# Altium PCB Temp_sense_Project 2.0(right angle.PcbDoc (part 4 of 5)
Units mm, origin at the board's own origin, x right, y up, seen from the top; angles counter-clockwise.
Board outline 238.12 x 109.47 mm, 4 copper layers (Top Layer, Layer 1, Layer 2, Bottom Layer), stack 0.603 mm thick; 185 components, 161 nets, 944 pads, 283 vias.
Unrouted connection lines stored in the file: 2.
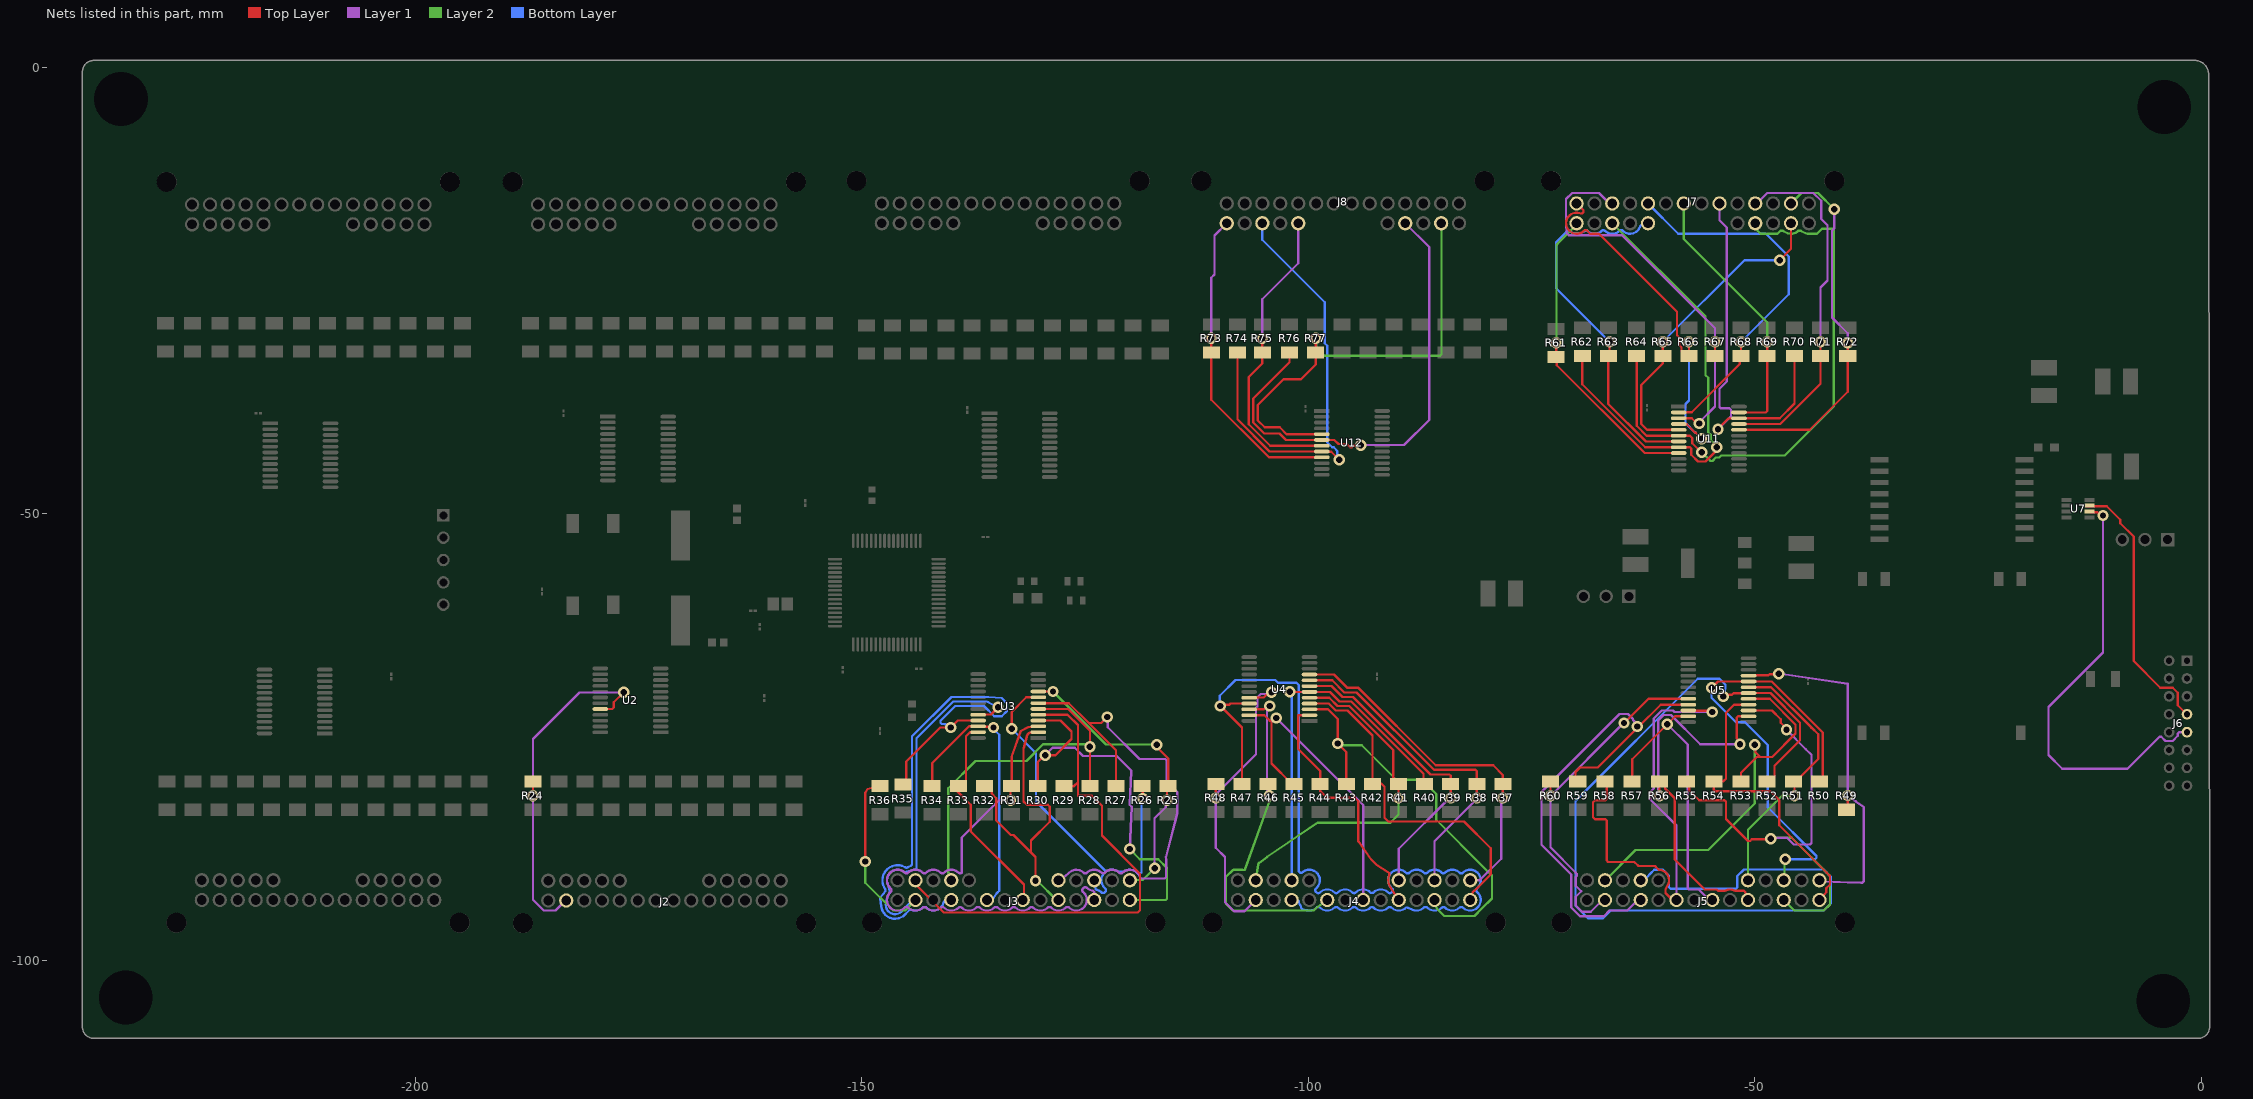
[diagram p5: the nets of this part, all layers, seen from the top]

## Via types
v1: diameter 1.27, hole 0.711, Top Layer to Bottom Layer, 278 vias
v2: diameter 0.711, hole 0.711, Top Layer to Bottom Layer, 4 vias
v3: diameter 1, hole 0.711, Top Layer to Bottom Layer, 1 vias

## Nets (pads, with @x,y where several pads share a name; then routed paths per layer and width w, separated by ;. In a path a pad name is that pad's centre, name@x,y a point inside that pad or via, vN(x,y) a via of type N, cw(c..) or ccw(c..) an arc to the next point about the centre after c; other vN are vias at no path point) (continued)
NetJ2_23: J2.23 R24.2 U2.20 | length 47.1
  Top Layer w0.254: v1(-186.808,-81.552) R24.2@-186.808,-79.968 ; U2.20@-179.261,-71.85 -177.934,-71.85 -177.746,-71.662 -177.746,-71.084 v1(-176.648,-69.986)
  Layer 1 w0.254: J2.23@-183.074,-93.278 J2.23@-183.1,-93.227 ; v1(-176.648,-69.986) -181.601,-69.986 -186.808,-75.193 v1(-186.808,-81.552) -186.808,-93.196 -185.595,-94.408 -184.281,-94.408 ; -184.281,-94.408 J2.23@-183.1,-93.227 ; -184.281,-94.408 J2.23@-183.1,-93.227 ; -184.281,-94.408 J2.23@-183.1,-93.227 ; -184.281,-94.408 J2.23@-183.112,-93.24 ; -184.281,-94.408 J2.23@-183.112,-93.24 ; J2.23@-183.112,-93.24 J2.23@-183.1,-93.227 ; J2.23@-183.112,-93.24 J2.23@-183.1,-93.227
NetJ3_1: J3.1 R25.2 U3.9 | length 36.7
  Top Layer w0.254: U3.9@-130.22,-69.885 v1(-128.591,-69.885) ; v1(-116.958,-75.828) -116.958,-76.103 -115.688,-77.373 R25.2@-115.688,-80.476 R25.2@-115.409,-80.476 ; v1(-115.815,-82.06) R25.2@-115.815,-80.882 ; R25.2@-115.815,-80.882 R25.2@-115.548,-80.615 ; R25.2@-115.815,-80.882 R25.2@-115.409,-80.476 ; R25.2@-115.815,-80.882 R25.2@-115.409,-80.476 ; R25.2@-115.815,-80.882 R25.2@-115.409,-80.476 ; R25.2@-115.815,-80.882 R25.2@-115.548,-80.615 ; R25.2@-115.548,-80.615 R25.2@-115.409,-80.476 ; R25.2@-115.548,-80.615 R25.2@-115.409,-80.476
  Layer 1 w0.254: v1(-117.212,-89.671) -117.212,-84.073 -115.972,-82.832 -115.972,-82.216 v1(-115.815,-82.06)
  Layer 2 w0.254: v1(-128.591,-69.885) -122.648,-75.828 v1(-116.958,-75.828) ; J3.1@-119.981,-91.017 -119.947,-90.984 -118.525,-90.984 v1(-117.212,-89.671)
NetJ3_3: J3.3 R26.2 U3.8 | length 72.8
  Top Layer w0.254: v1(-133.214,-74.05) -133.214,-72.165 -131.584,-70.535 U3.8@-130.22,-70.535 ; R26.2@-118.609,-80.476 -118.551,-80.533 v1(-118.551,-81.866)
  Bottom Layer w0.254: v1(-133.214,-74.05) -130.482,-76.782 -130.482,-82.211 ; J3.3@-123.968,-91.017 J3.3@-123.835,-91.151 ; v1(-118.551,-81.866) -118.685,-82 -118.685,-90.134 ; -130.482,-82.211 -122.652,-90.041 ; -130.482,-82.211 -122.652,-90.041 ; -123.835,-92.054 cw(c-123.968,-93.227) -123.152,-92.373 ; -123.835,-92.054 cw(c-123.968,-93.227) -123.152,-92.373 ; -123.835,-92.054 cw(c-123.968,-93.227) -123.152,-92.373 ; -123.835,-92.054 J3.3@-123.835,-91.151 ; -123.835,-92.054 J3.3@-123.835,-91.151 ; -123.835,-92.054 J3.3@-123.835,-91.151 ; -123.152,-92.373 ccw(c-122.978,-92.189) -122.803,-92.373 ; -123.152,-92.373 ccw(c-122.978,-92.189) -122.803,-92.373 ; -123.152,-92.373 ccw(c-122.978,-92.189) -122.803,-92.373 ; -122.803,-92.373 cw(c-121.987,-93.227) -122.74,-92.317 ccw(c-122.903,-92.122) -122.74,-91.927 ; -122.74,-91.927 cw(c-121.987,-91.017) -122.654,-90.042 ; -122.74,-91.927 cw(c-121.987,-91.017) -122.654,-90.042 ; -122.74,-91.927 cw(c-121.987,-91.017) -122.654,-90.042 ; -122.654,-90.042 -122.652,-90.041 ; -122.654,-90.042 -122.652,-90.041 ; -122.654,-90.042 -122.652,-90.041 ; -122.652,-90.041 cw(c-121.987,-91.017) -121.323,-90.041 ; -122.652,-90.041 cw(c-121.987,-91.017) -121.323,-90.041 ; -122.652,-90.041 cw(c-121.987,-91.017) -121.323,-90.041 ; -121.323,-90.041 -120.645,-90.041 ; -121.323,-90.041 -120.645,-90.041 ; -121.323,-90.041 -120.645,-90.041 ; -120.645,-90.041 cw(c-119.981,-91.017) -119.123,-90.206 ; -120.645,-90.041 cw(c-119.981,-91.017) -119.123,-90.206 ; -120.645,-90.041 cw(c-119.981,-91.017) -119.123,-90.206 ; -119.123,-90.206 ccw(c-118.939,-90.03) -119.118,-90.21 -119.044,-90.283 ; -119.044,-90.283 -118.941,-90.284 ; -119.044,-90.283 -118.941,-90.284 ; -119.044,-90.283 -118.941,-90.284 ; -118.941,-90.284 ccw(c-118.939,-90.03) -118.937,-90.284 ; -118.941,-90.284 ccw(c-118.939,-90.03) -118.937,-90.284 ; -118.941,-90.284 ccw(c-118.939,-90.03) -118.937,-90.284 ; -118.937,-90.284 -118.834,-90.283 ; -118.937,-90.284 -118.834,-90.283 ; -118.937,-90.284 -118.834,-90.283 ; -118.834,-90.283 -118.76,-90.21 ; -118.834,-90.283 -118.76,-90.21 ; -118.834,-90.283 -118.76,-90.21 ; -118.76,-90.21 ccw(c-118.939,-90.03) -118.759,-90.209 ; -118.76,-90.21 ccw(c-118.939,-90.03) -118.759,-90.209 ; -118.76,-90.21 ccw(c-118.939,-90.03) -118.759,-90.209 ; -118.759,-90.209 -118.685,-90.134 ; -118.759,-90.209 -118.685,-90.134 ; -118.759,-90.209 -118.685,-90.134
NetJ3_5: J3.5 R27.2 U3.7 | length 63.8
  Top Layer w0.254: U3.7@-130.22,-71.185 -126.815,-71.185 -124.585,-73.415 ; v1(-122.507,-72.741) -123.181,-73.415 -124.585,-73.415 ; R27.2@-121.53,-80.476 -121.53,-76.47 -124.585,-73.415
  Layer 1 w0.254: J3.5@-127.982,-91.017 -127.09,-90.465 ; v1(-122.507,-72.741) -122.458,-73.884 -118.914,-77.428 -116.04,-77.428 -115.966,-77.503 -115.891,-77.577 -115.891,-80.835 -115.742,-80.984 -114.821,-80.984 -114.672,-81.132 -114.672,-83.461 -114.68,-83.525 -115.949,-88.417 -115.947,-88.515 -115.9,-88.684 -115.9,-88.824 -115.926,-90.669 -115.997,-90.74 -116.071,-90.814 -118.725,-90.814 -118.8,-90.74 ; -127.09,-90.465 -126.884,-90.264 ; -127.09,-90.465 -126.884,-90.264 ; -127.09,-90.465 -126.884,-90.264 ; -126.884,-90.264 cw(c-125.975,-91.017) -125.148,-90.174 ; -126.884,-90.264 cw(c-125.975,-91.017) -125.148,-90.174 ; -126.884,-90.264 cw(c-125.975,-91.017) -125.148,-90.174 ; -125.148,-90.174 ccw(c-124.972,-89.991) -124.795,-90.174 cw(c-123.968,-91.017) -123.152,-90.164 ccw(c-122.978,-89.979) -122.803,-90.164 cw(c-121.987,-91.017) -121.161,-90.174 ccw(c-120.984,-89.991) -120.807,-90.174 ; -120.807,-90.174 cw(c-119.981,-91.017) -118.844,-90.695 ; -120.807,-90.174 cw(c-119.981,-91.017) -118.844,-90.695 ; -120.807,-90.174 cw(c-119.981,-91.017) -118.844,-90.695 ; -118.844,-90.695 -118.8,-90.74 ; -118.844,-90.695 -118.8,-90.74 ; -118.844,-90.695 -118.8,-90.74
NetJ3_7: J3.7 R28.2 U3.6 | length 41.4
  Top Layer w0.254: U3.6@-130.22,-71.835 -126.884,-71.835 -124.451,-74.268 v1(-124.451,-76.082) R28.2@-124.451,-80.476
  Layer 2 w0.254: J3.7@-139.97,-91.017 -140.228,-90.76 -140.228,-90.27 -140.302,-90.195 -140.302,-80.703 -137.262,-77.663 -131.556,-77.663 -129.692,-75.798 -124.735,-75.798 v1(-124.451,-76.082)
NetJ3_9: J3.9 R29.2 U3.5 | length 58.2
  Top Layer w0.254: J3.9@-143.984,-91.017 -143.857,-91.144 -143.857,-91.576 -140.801,-94.631 -119.099,-94.631 -118.838,-94.37 -118.838,-90.281 -123.105,-86.013 -123.105,-82.686 -124.248,-81.543 -125.797,-81.543 -125.797,-80.044 ; U3.5@-130.22,-72.485 -126.952,-72.485 -125.797,-73.64 -125.797,-80.044 ; R29.2@-127.372,-80.476 -126.228,-80.476 -125.797,-80.044
NetJ3_11: J3.11 R30.2 U3.4 | length 45
  Top Layer w0.254: R30.2@-130.293,-80.476 -130.293,-77.779 v1@-129.674,-77.161 ; U3.4@-130.22,-73.135 -127.739,-73.135 -126.513,-74.362 -126.513,-75.203 -128.318,-77.009 v1(-129.466,-77.009)
  Layer 1 w0.254: v1(-129.466,-77.009) -128.638,-76.181 -126.144,-76.181 -125.227,-77.098 -121.454,-77.098 -119.811,-78.74 -120.006,-82.559 -119.766,-82.799 v1(-120.006,-87.512)
  Layer 2 w0.254: v1(-120.006,-87.512) -118.863,-88.655 -116.791,-88.655 -115.815,-89.631 -115.815,-93.078 -115.964,-93.227 J3.11@-119.981,-93.227
NetJ3_13: J3.13 R31.2 U3.3 | length 72.7
  Top Layer w0.254: U3.3@-130.22,-73.785 -131.379,-73.888 -132.198,-74.304 -133.214,-77.21 -133.214,-78.645 ; v1(-133.341,-82.06) R31.2@-133.341,-80.782 ; v1(-133.341,-82.06) R31.2@-133.341,-80.782 ; v1(-133.341,-82.06) R31.2@-133.341,-80.782 ; R31.2@-133.341,-80.782 cw(c-132.907,-80.782) R31.2@-133.214,-80.476 ; R31.2@-133.341,-80.782 cw(c-132.907,-80.782) R31.2@-133.214,-80.476 ; R31.2@-133.341,-80.782 cw(c-132.907,-80.782) R31.2@-133.214,-80.476 ; R31.2@-133.214,-80.476 -133.214,-78.645 ; R31.2@-133.214,-80.476 -133.214,-78.645 ; R31.2@-133.214,-80.476 -133.214,-78.645
  Layer 1 w0.254: v1(-133.341,-82.06) -134.62,-82.06 -138.795,-86.235 -138.795,-90.015 -138.805,-90.025 ; J3.13@-123.968,-93.227 -123.968,-92.324 -124.043,-92.25 -124.102,-92.191 ; -139.154,-90.164 ccw(c-139.97,-91.017) -140.797,-90.174 cw(c-140.974,-89.991) -141.15,-90.174 ccw(c-141.977,-91.017) -142.804,-90.174 cw(c-142.98,-89.991) -143.157,-90.174 ccw(c-143.984,-91.017) -144.81,-90.174 cw(c-144.987,-89.991) -145.164,-90.174 ccw(c-145.99,-91.017) -146.743,-91.927 cw(c-146.906,-92.122) -146.743,-92.317 ccw(c-145.99,-93.227) -145.164,-94.071 cw(c-144.987,-94.253) -144.81,-94.071 ccw(c-143.984,-93.227) -143.157,-94.071 cw(c-142.98,-94.253) -142.803,-94.071 ccw(c-141.977,-93.227) -141.151,-94.071 cw(c-140.974,-94.253) -140.797,-94.071 ccw(c-139.97,-93.227) -139.154,-94.081 cw(c-138.98,-94.265) -138.805,-94.081 ccw(c-137.989,-93.227) -137.163,-94.071 cw(c-136.986,-94.253) -136.809,-94.071 ccw(c-135.983,-93.227) -135.156,-94.071 cw(c-134.979,-94.253) -134.802,-94.071 ccw(c-133.976,-93.227) -133.15,-94.071 cw(c-132.973,-94.253) -132.796,-94.071 ccw(c-131.969,-93.227) -131.153,-94.081 cw(c-130.979,-94.265) -130.804,-94.081 ccw(c-129.988,-93.227) -129.162,-94.071 cw(c-128.985,-94.253) -128.808,-94.071 ccw(c-127.982,-93.227) -127.155,-94.071 cw(c-126.978,-94.253) -126.801,-94.071 ccw(c-125.975,-93.227) -125.222,-92.317 cw(c-125.059,-92.122) -125.222,-91.927 ccw(c-125.975,-91.017) -125.149,-91.861 cw(c-124.972,-92.043) -124.795,-91.861 ; -139.154,-90.164 ccw(c-138.98,-89.979) -138.805,-90.164 ; -139.154,-90.164 ccw(c-138.98,-89.979) -138.805,-90.164 ; -139.154,-90.164 ccw(c-138.98,-89.979) -138.805,-90.164 ; -138.805,-90.164 -138.805,-90.025 ; -138.805,-90.164 -138.805,-90.025 ; -138.805,-90.164 -138.805,-90.025 ; -124.795,-91.861 ccw(c-123.968,-91.017) -124.102,-92.191 ; -124.795,-91.861 ccw(c-123.968,-91.017) -124.102,-92.191 ; -124.795,-91.861 ccw(c-123.968,-91.017) -124.102,-92.191
NetJ3_15: J3.15 R32.2 U3.2 | length 51.1
  Top Layer w0.254: R32.2@-136.262,-80.476 -135.986,-80.476 -135.436,-81.026 -135.436,-81.313 -134.928,-81.821 -134.928,-84.313 -133.304,-85.937 -133.011,-85.937 -131.055,-87.893 ; v1(-130.547,-91.068) -130.547,-88.401 -131.055,-87.893 ; U3.2@-130.22,-74.435 U3.2@-130.889,-74.435 ; -131.88,-82.185 -131.88,-76.269 ; -131.88,-82.185 -131.497,-82.568 -129.182,-82.568 -128.959,-82.791 -128.959,-84.462 -131.055,-86.558 -131.055,-87.893 ; -131.88,-82.185 -131.88,-76.269 ; -131.88,-82.185 -131.88,-76.269 ; -131.88,-76.269 cw(c-131.626,-76.269) -131.87,-76.199 ; -131.88,-76.269 cw(c-131.626,-76.269) -131.87,-76.199 ; -131.88,-76.269 cw(c-131.626,-76.269) -131.87,-76.199 ; -131.87,-76.199 -131.463,-74.773 ; -131.87,-76.199 -131.463,-74.773 ; -131.87,-76.199 -131.463,-74.773 ; -131.463,-74.773 cw(c-131.096,-74.878) -131.186,-74.507 ; -131.463,-74.773 cw(c-131.096,-74.878) -131.186,-74.507 ; -131.463,-74.773 cw(c-131.096,-74.878) -131.186,-74.507 ; -131.186,-74.507 U3.2@-130.889,-74.435 ; -131.186,-74.507 U3.2@-130.889,-74.435 ; -131.186,-74.507 U3.2@-130.889,-74.435
  Layer 2 w0.254: v1(-130.547,-91.068) -130.344,-91.068 -128.185,-93.227 J3.15@-127.982,-93.227
NetJ3_17: J3.17 R33.2 U3.23 | length 54.4
  Top Layer w0.254: U3.23@-136.97,-74.435 -137.866,-74.435 -138.319,-74.888 ; J3.17@-131.969,-93.227 J3.17@-131.842,-93.354 ; J3.17@-131.842,-93.786 J3.17@-131.842,-93.227 ; R33.2@-138.319,-80.476 -138.319,-74.888 ; R33.2@-138.319,-80.476 R33.2@-139.183,-80.476 -139.319,-81.026 -137.786,-82.559 -137.786,-85.556 -131.842,-91.5 ; R33.2@-138.319,-80.476 -138.319,-74.888 ; R33.2@-138.319,-80.476 -138.319,-74.888 ; R33.2@-138.319,-80.476 -138.319,-74.888 ; R33.2@-138.319,-80.476 -138.319,-74.888 ; J3.17@-131.842,-93.354 J3.17@-131.842,-93.227 ; J3.17@-131.842,-93.354 -131.842,-91.5 ; J3.17@-131.842,-93.354 -131.842,-91.5 ; J3.17@-131.842,-93.354 J3.17@-131.842,-93.227 ; J3.17@-131.842,-93.227 -131.842,-91.5 ; J3.17@-131.842,-93.227 -131.842,-91.5 ; J3.17@-131.842,-93.227 -131.842,-91.5
NetJ3_19: J3.19 R34.2 U3.22 | length 34.3
  Top Layer w0.254: R34.2@-142.104,-80.476 -142.104,-77.9 -137.989,-73.785 U3.22@-136.97,-73.785 -136.939,-73.816 -135.342,-73.816 v1(-135.246,-73.912)
  Bottom Layer w0.254: J3.19@-135.983,-93.227 -135.469,-93.227 -135.32,-93.078 -134.938,-92.542 ; v1(-135.246,-73.912) -135.246,-74.079 -134.611,-74.714 -134.611,-92.192 ; -134.938,-92.542 cw(c-133.976,-93.227) -134.811,-92.392 ; -134.938,-92.542 cw(c-133.976,-93.227) -134.811,-92.392 ; -134.938,-92.542 cw(c-133.976,-93.227) -134.811,-92.392 ; -134.938,-92.542 cw(c-133.976,-93.227) -134.811,-92.392 ; -134.938,-92.542 cw(c-133.976,-93.227) -134.811,-92.392 ; -134.938,-92.542 cw(c-133.976,-93.227) -134.811,-92.392 ; -134.938,-92.542 cw(c-133.976,-93.227) -134.811,-92.392 ; -134.938,-92.542 cw(c-133.976,-93.227) -134.811,-92.392 ; -134.938,-92.542 cw(c-133.976,-93.227) -134.811,-92.392 ; -134.811,-92.392 -134.611,-92.192 ; -134.811,-92.392 -134.611,-92.192 ; -134.811,-92.392 -134.611,-92.192 ; -134.811,-92.392 -134.611,-92.192 ; -134.811,-92.392 -134.611,-92.192
NetJ3_21: J3.21 R35.2 U3.21 | length 87.8
  Top Layer w0.254: R35.2@-145.393,-80.297 R35.2@-145.025,-80.297 ; U3.21@-136.97,-73.135 -139.244,-73.135 v1(-140.021,-73.912) -141.204,-73.912 -145.025,-77.733 ; R35.2@-145.025,-80.297 -145.025,-77.733 ; R35.2@-145.025,-80.297 -145.025,-77.733 ; R35.2@-145.025,-80.297 -145.025,-77.733
  Bottom Layer w0.254: -144.511,-89.412 ccw(c-143.984,-91.017) -144.857,-89.571 cw(c-144.987,-89.353) -145.117,-89.571 ccw(c-145.99,-91.017) -147.379,-91.978 cw(c-147.589,-92.122) -147.379,-92.266 ccw(c-145.99,-93.227) -147.504,-92.478 -147.922,-92.923 -147.922,-93.045 -147.8,-93.975 ; J3.21@-139.97,-93.227 J3.21@-140.7,-93.323 ; -147.8,-93.975 ccw(c-146.268,-93.775) -145.655,-95.193 ; -147.8,-93.975 ccw(c-146.268,-93.775) -145.655,-95.193 ; -147.8,-93.975 ccw(c-146.268,-93.775) -145.655,-95.193 ; -145.655,-95.193 -145.391,-95.079 ; -145.655,-95.193 -145.391,-95.079 ; -145.655,-95.193 -145.391,-95.079 ; -145.391,-95.079 -144.618,-94.307 -144.462,-94.307 ccw(c-143.984,-93.227) -143.157,-94.071 cw(c-142.98,-94.253) -142.803,-94.071 ; -144.511,-89.412 -144.469,-89.371 ; -144.511,-89.412 -144.469,-89.371 ; -144.511,-89.412 -144.469,-89.371 ; -144.469,-89.371 ccw(c-144.649,-89.192) -144.468,-89.37 ; -144.469,-89.371 ccw(c-144.649,-89.192) -144.468,-89.37 ; -144.469,-89.371 ccw(c-144.649,-89.192) -144.468,-89.37 ; -144.468,-89.37 -144.365,-89.264 -144.365,-74.906 -139.952,-70.494 -135.802,-70.494 -134.317,-70.621 -133.722,-71.216 -133.722,-72.058 -134.317,-72.653 -135.159,-72.653 -136.302,-71.51 -139.531,-71.51 -141.185,-73.163 -141.185,-73.268 -141.185,-73.374 -141.11,-73.448 -141.036,-73.522 ; -142.803,-94.071 ccw(c-141.977,-93.227) -140.815,-93.437 ; -142.803,-94.071 ccw(c-141.977,-93.227) -140.815,-93.437 ; -142.803,-94.071 ccw(c-141.977,-93.227) -140.815,-93.437 ; -141.036,-73.522 -140.996,-73.522 ; -141.036,-73.522 -140.996,-73.522 ; -141.036,-73.522 -140.996,-73.522 ; -140.996,-73.522 cw(c-140.977,-74.888) v1@-140.024,-73.91 ; -140.996,-73.522 cw(c-140.977,-74.888) v1@-140.024,-73.91 ; -140.996,-73.522 cw(c-140.977,-74.888) v1@-140.024,-73.91 ; -140.815,-93.437 J3.21@-140.7,-93.323 ; -140.815,-93.437 J3.21@-140.7,-93.323 ; -140.815,-93.437 J3.21@-140.7,-93.323 ; v1@-140.024,-73.91 v1(-140.021,-73.912) ; v1@-140.024,-73.91 v1(-140.021,-73.912) ; v1@-140.024,-73.91 v1(-140.021,-73.912)
NetJ3_23: J3.23 R36.2 U3.20 | length 129.8
  Top Layer w0.254: v1(-149.597,-88.909) -149.597,-81.211 -149.336,-80.795 R36.2@-147.946,-80.476 ; U3.20@-136.97,-72.485 -136.939,-72.454 -135.537,-72.454 -134.738,-71.655 v1(-134.738,-71.637)
  Layer 2 w0.254: v1(-149.597,-88.909) -149.597,-91.291 -146.479,-94.408 -145.165,-94.408 J3.23@-143.984,-93.227
  Bottom Layer w0.254: J3.23@-143.984,-93.227 -144.316,-93.234 J3.23@-144.39,-93.308 ; v1(-134.738,-71.637) -135.799,-71.095 -136.012,-71.002 -139.742,-71.002 -143.857,-75.117 -143.857,-89.687 -144.005,-89.836 ; -147.25,-93.44 ccw(c-146.268,-93.775) -145.604,-94.571 ; -147.25,-93.44 ccw(c-146.268,-93.775) -145.604,-94.571 ; -147.25,-93.44 ccw(c-146.268,-93.775) -145.604,-94.571 ; -147.25,-93.44 ccw(c-146.268,-93.775) -145.604,-94.571 ; -147.25,-93.44 ccw(c-146.268,-93.775) -145.604,-94.571 ; -147.25,-93.44 ccw(c-146.268,-93.775) -145.604,-94.571 ; -147.25,-93.44 ccw(c-146.268,-93.775) -145.604,-94.571 ; -147.25,-93.44 ccw(c-146.268,-93.775) -145.604,-94.571 ; -147.25,-93.44 ccw(c-146.268,-93.775) -145.604,-94.571 ; -147.25,-93.44 -147.142,-92.966 ; -147.25,-93.44 -147.142,-92.966 ; -147.25,-93.44 -147.142,-92.966 ; -147.25,-93.44 -147.142,-92.966 ; -147.25,-93.44 -147.142,-92.966 ; -147.142,-92.965 cw(c-145.99,-93.227) -146.827,-92.393 ; -147.142,-92.965 cw(c-145.99,-93.227) -146.827,-92.393 ; -147.142,-92.965 cw(c-145.99,-93.227) -146.827,-92.393 ; -147.142,-92.965 cw(c-145.99,-93.227) -146.827,-92.393 ; -147.142,-92.965 cw(c-145.99,-93.227) -146.827,-92.393 ; -147.142,-92.965 cw(c-145.99,-93.227) -146.827,-92.393 ; -147.142,-92.965 cw(c-145.99,-93.227) -146.827,-92.393 ; -147.142,-92.965 cw(c-145.99,-93.227) -146.827,-92.393 ; -147.142,-92.965 cw(c-145.99,-93.227) -146.827,-92.393 ; -147.126,-91.341 cw(c-145.99,-91.017) -145.228,-90.115 ; -147.126,-91.341 cw(c-145.99,-91.017) -145.228,-90.115 ; -147.126,-91.341 cw(c-145.99,-91.017) -145.228,-90.115 ; -147.126,-91.341 cw(c-145.99,-91.017) -145.228,-90.115 ; -147.126,-91.341 cw(c-145.99,-91.017) -145.228,-90.115 ; -147.126,-91.341 cw(c-145.99,-91.017) -145.228,-90.115 ; -147.126,-91.341 cw(c-145.99,-91.017) -145.228,-90.115 ; -147.126,-91.341 cw(c-145.99,-91.017) -145.228,-90.115 ; -147.126,-91.341 cw(c-145.99,-91.017) -145.228,-90.115 ; -147.126,-91.341 -146.827,-92.393 ; -147.126,-91.341 -146.827,-92.393 ; -147.126,-91.341 -146.827,-92.393 ; -147.126,-91.341 -146.827,-92.393 ; -147.126,-91.341 -146.827,-92.393 ; -145.604,-94.571 ccw(c-145.897,-94.22) -145.533,-94.497 ; -145.604,-94.571 ccw(c-145.897,-94.22) -145.533,-94.497 ; -145.604,-94.571 ccw(c-145.897,-94.22) -145.533,-94.497 ; -145.604,-94.571 ccw(c-145.897,-94.22) -145.533,-94.497 ; -145.604,-94.571 ccw(c-145.897,-94.22) -145.533,-94.497 ; -145.604,-94.571 ccw(c-145.897,-94.22) -145.533,-94.497 ; -145.604,-94.571 ccw(c-145.897,-94.22) -145.533,-94.497 ; -145.604,-94.571 ccw(c-145.897,-94.22) -145.533,-94.497 ; -145.604,-94.571 ccw(c-145.897,-94.22) -145.533,-94.497 ; -145.533,-94.497 J3.23@-144.39,-93.308 ; -145.533,-94.497 J3.23@-144.39,-93.308 ; -145.533,-94.497 J3.23@-144.39,-93.308 ; -145.533,-94.497 J3.23@-144.39,-93.308 ; -145.533,-94.497 J3.23@-144.39,-93.308 ; -145.228,-90.115 -144.275,-89.873 ; -145.228,-90.115 -144.275,-89.873 ; -145.228,-90.115 -144.275,-89.873 ; -145.228,-90.115 -144.275,-89.873 ; -145.228,-90.115 -144.275,-89.873 ; -144.275,-89.873 cw(c-143.984,-91.017) -144.028,-89.837 ; -144.275,-89.873 cw(c-143.984,-91.017) -144.028,-89.837 ; -144.275,-89.873 cw(c-143.984,-91.017) -144.028,-89.837 ; -144.275,-89.873 cw(c-143.984,-91.017) -144.028,-89.837 ; -144.275,-89.873 cw(c-143.984,-91.017) -144.028,-89.837 ; -144.275,-89.873 cw(c-143.984,-91.017) -144.028,-89.837 ; -144.275,-89.873 cw(c-143.984,-91.017) -144.028,-89.837 ; -144.275,-89.873 cw(c-143.984,-91.017) -144.028,-89.837 ; -144.275,-89.873 cw(c-143.984,-91.017) -144.028,-89.837 ; -144.028,-89.837 -144.005,-89.836 ; -144.028,-89.837 -144.005,-89.836 ; -144.028,-89.837 -144.005,-89.836 ; -144.028,-89.837 -144.005,-89.836 ; -144.028,-89.837 -144.005,-89.836
NetJ4_1: J4.1 R37.2 U4.9 | length 40.2
  Top Layer w0.254: U4.9@-99.867,-67.98 -97.12,-67.98 -95.622,-69.478 -94.396,-69.478 -85.727,-78.147 -79.31,-78.147 -78.223,-79.234 v1(-78.223,-81.806)
  Layer 1 w0.254: J4.1@-81.881,-91.017 -80.839,-91.017 -78.417,-88.595 -78.417,-82 v1(-78.223,-81.806)
NetJ4_3: J4.3 R38.2 U4.8 | length 64.4
  Top Layer w0.254: U4.8@-99.867,-68.63 -97.334,-68.63 -95.978,-69.986 -94.606,-69.986 -85.937,-78.655 -81.293,-78.655 -81.144,-78.804 R38.2@-81.144,-80.222 v1(-81.144,-81.806)
  Layer 1 w0.254: J4.3@-85.868,-91.017 -85.868,-86.648 ; v1(-81.144,-81.806) v1@-81.144,-81.543 ; -85.868,-86.648 v1@-81.085,-81.865 ; -85.868,-86.648 v1@-81.085,-81.865 ; -85.868,-86.648 v1@-81.085,-81.865 ; -85.868,-86.648 v1@-81.085,-81.865 ; -85.868,-86.648 v1@-81.085,-81.865
NetJ4_5: J4.5 R39.2 U4.7 | length 34.1
  Top Layer w0.254: U4.7@-99.867,-69.28 -97.402,-69.28 -96.188,-70.494 -94.991,-70.494 -86.322,-79.163 -84.214,-79.163 -84.065,-79.312 v1(-84.065,-81.806)
  Layer 1 w0.254: J4.5@-89.882,-91.017 -89.882,-87.495 -84.192,-81.806 v1(-84.065,-81.806)
NetJ4_7: J4.7 R40.2 U4.6 | length 41.2
  Top Layer w0.254: v1(-102.099,-69.927) -102.097,-69.928 -99.868,-69.928 U4.6@-99.867,-69.93 -97.587,-69.93 -96.515,-71.002 -95.201,-71.002 -87.112,-79.091 -87.112,-80.096 R40.2@-86.986,-80.222
  Bottom Layer w0.254: v1(-102.099,-69.927) -102.099,-70.202 -101.87,-70.43 J4.7@-101.87,-91.017
NetJ4_9: J4.9 R41.2 U4.5 | length 48.9
  Top Layer w0.254: U4.5@-99.867,-70.58 -97.655,-70.58 -96.725,-71.51 -95.411,-71.51 -90.491,-76.43 ; v1(-89.907,-81.806) R41.2@-89.907,-80.222 R41.2@-90.491,-80.222 ; R41.2@-90.491,-80.222 -90.491,-76.43 ; R41.2@-90.491,-80.222 -90.491,-76.43 ; R41.2@-90.491,-80.222 -90.491,-76.43
  Layer 2 w0.254: J4.9@-105.884,-91.017 -105.6,-89.215 -105.587,-89.134 -105.515,-89.061 ; v1(-89.907,-81.806) -89.907,-83.644 -90.829,-84.566 -98.963,-84.566 -104.582,-88.383 ; -105.515,-89.061 -104.614,-88.405 ; -105.515,-89.061 -104.614,-88.405 ; -105.515,-89.061 -104.614,-88.405 ; -104.614,-88.405 cw(c-103.918,-89.36) -104.582,-88.383 ; -104.614,-88.405 cw(c-103.918,-89.36) -104.582,-88.383 ; -104.614,-88.405 cw(c-103.918,-89.36) -104.582,-88.383
NetJ4_11: J4.11 R42.2 U4.4 | length 39
  Top Layer w0.254: U4.4@-99.867,-71.23 -97.724,-71.23 -96.936,-72.018 -95.622,-72.018 -92.828,-74.812 R42.2@-92.828,-80.222 -91.812,-80.222 -91.482,-80.552 -91.482,-84.007 -91.05,-84.439 -82.566,-84.439 -79.569,-87.436 -79.569,-90.376 -81.391,-92.198 -81.449,-92.198 -81.623,-92.372 -81.623,-92.969 J4.11@-81.881,-93.227
NetJ4_13: J4.13 R43.2 U4.3 | length 47.3
  Top Layer w0.254: U4.3@-99.867,-71.88 -97.792,-71.88 -96.714,-72.958 v1(-96.714,-75.701) -95.749,-76.666 R43.2@-95.749,-80.222
  Layer 2 w0.254: v1(-96.714,-75.701) -96.52,-75.895 -96.068,-75.895 -96.057,-75.906 -94.02,-75.906 -90.152,-79.774 -87.278,-79.774 -85.685,-81.367 -85.685,-84.241 -80.35,-89.576 -79.441,-90.485 -79.441,-93.055 -80.547,-94.161 -80.567,-94.161 -81.411,-95.005 -83.639,-95.005 -84.79,-95.005 -85.571,-94.224 -85.583,-94.2 -85.929,-93.509 -85.929,-93.408 J4.13@-85.868,-93.227
NetJ4_15: J4.15 R44.2 U4.2 | length 28.4
  Top Layer w0.254: U4.2@-99.867,-72.53 -101.134,-72.53 -101.134,-76.311 -98.67,-78.774 R44.2@-98.67,-80.222 -98.67,-81.035 -97.917,-81.788 -94.793,-81.788 -94.403,-82.178 -94.403,-86.67 -92.955,-88.695 -92.36,-89.29 -91.099,-90.08 -90.95,-90.228 -90.95,-90.406 -91.023,-90.714 ccw(c-89.882,-91.017) -90.903,-91.61 -90.795,-91.797 J4.15@-89.882,-93.227
NetJ4_17: J4.17 R45.2 U4.23 | length 57.4
  Top Layer w0.254: U4.23@-106.617,-72.53 -104.937,-72.53 -104.306,-73.161 v1@-104.004,-73.161 ; v1(-103.587,-72.845) -103.688,-72.845 v1@-104.004,-73.161 ; R45.2@-101.591,-80.222 -101.866,-80.222 -104.131,-77.957 -104.131,-73.288 v1@-104.004,-73.161
  Layer 1 w0.254: v1(-103.587,-72.845) -93.844,-82.588 ; J4.17@-93.844,-93.227 -93.844,-82.588 ; J4.17@-93.844,-93.227 -93.844,-82.588 ; J4.17@-93.844,-93.227 -93.844,-82.588
NetJ4_19: J4.19 R46.2 U4.22 | length 51
  Top Layer w0.254: U4.22@-106.617,-71.88 -104.958,-71.88 -104.579,-71.5 v1(-104.304,-71.5) ; R46.2@-104.512,-80.222 -104.385,-80.349 v1(-104.385,-81.543)
  Layer 1 w0.254: v1(-104.385,-81.543) -104.639,-81.289 -104.639,-71.836 v1(-104.304,-71.5)
  Layer 2 w0.254: -104.639,-72.111 -104.304,-71.775 v1(-104.304,-71.5) ; J4.19@-97.883,-93.227 -99.119,-94.127 -99.4,-94.408 -100.378,-94.408 ; -107.889,-94.408 -100.378,-94.408 ; -107.889,-94.408 -100.378,-94.408 ; -107.889,-94.408 -108.437,-94.408 -109.211,-93.634 -109.211,-93.086 -109.211,-92.592 -109.211,-91.184 -109.211,-90.625 -108.441,-89.855 -108.398,-89.855 -108.379,-89.836 -107.401,-89.836 -107.383,-89.855 -107.11,-89.855 -104.294,-81.998 -104.294,-81.634 v1(-104.385,-81.543) -104.527,-81.685 -104.699,-81.685 -104.618,-81.46 v1@-104.498,-81.126 ; v1@-104.498,-81.543 v1@-104.498,-81.126 ; v1@-104.498,-81.543 v1@-104.498,-81.126 ; v1@-104.498,-81.543 v1@-104.498,-81.126
NetJ4_21: J4.21 R47.2 U4.21 | length 158.8
  Top Layer w0.254: R47.2@-107.433,-80.222 -107.433,-73.923 v1(-109.846,-71.51) -109.693,-71.357 -108.83,-71.357 -108.703,-71.23 U4.21@-106.617,-71.23
  Bottom Layer w0.254: v1(-109.846,-71.51) -109.922,-71.434 -109.922,-70.367 -108.144,-68.589 -103.71,-68.589 -103.392,-68.908 -101.32,-68.908 -101.145,-69.083 -101.07,-69.157 -101.07,-90.027 -100.996,-90.101 -100.921,-90.176 ; J4.21@-101.87,-93.227 -101.196,-93.227 -101.122,-93.301 -101.063,-93.361 ; -90.637,-91.925 cw(c-89.882,-91.017) -89.055,-90.174 ccw(c-88.878,-89.991) -88.702,-90.174 cw(c-87.875,-91.017) -87.048,-90.174 ccw(c-86.872,-89.991) -86.695,-90.174 cw(c-85.868,-91.017) -85.052,-90.164 ccw(c-84.878,-89.979) -84.703,-90.164 cw(c-83.887,-91.017) -83.061,-90.174 ccw(c-82.884,-89.991) -82.707,-90.174 cw(c-81.881,-91.017) -81.128,-91.927 ccw(c-80.965,-92.122) -81.128,-92.317 cw(c-81.881,-93.227) -82.707,-94.071 ccw(c-82.884,-94.253) -83.061,-94.071 cw(c-83.887,-93.227) -84.703,-94.081 ccw(c-84.878,-94.265) -85.052,-94.081 cw(c-85.868,-93.227) -86.695,-94.071 ccw(c-86.872,-94.253) -87.049,-94.071 cw(c-87.875,-93.227) -88.336,-94.315 -88.86,-94.092 ; -90.636,-91.926 ccw(c-90.14,-91.33) -90.635,-91.927 cw(c-90.797,-92.122) -90.635,-92.317 ccw(c-89.882,-93.227) -90.708,-92.383 cw(c-90.885,-92.201) -91.062,-92.383 ccw(c-91.888,-93.227) -92.704,-92.373 cw(c-92.879,-92.189) -93.053,-92.373 ccw(c-93.869,-93.227) -94.696,-92.383 cw(c-94.873,-92.201) -95.049,-92.383 ccw(c-95.876,-93.227) -96.703,-92.383 cw(c-96.879,-92.201) -97.056,-92.383 ccw(c-97.883,-93.227) -98.709,-92.383 cw(c-98.886,-92.201) -99.063,-92.383 ccw(c-99.889,-93.227) -99.136,-92.317 cw(c-98.973,-92.122) -99.136,-91.927 ; -88.86,-94.092 ccw(c-88.959,-94.326) -88.959,-94.072 ; -101.063,-93.361 ccw(c-99.889,-93.227) -100.829,-93.942 ; -101.063,-93.361 ccw(c-99.889,-93.227) -100.829,-93.942 ; -101.063,-93.361 ccw(c-99.889,-93.227) -100.829,-93.942 ; -101.063,-93.361 ccw(c-99.889,-93.227) -100.829,-93.942 ; -101.063,-93.361 ccw(c-99.889,-93.227) -100.829,-93.942 ; -101.063,-93.361 ccw(c-99.889,-93.227) -100.829,-93.942 ; -101.063,-93.361 ccw(c-99.889,-93.227) -100.829,-93.942 ; -101.063,-93.361 ccw(c-99.889,-93.227) -100.829,-93.942 ; -101.063,-93.361 ccw(c-99.889,-93.227) -100.829,-93.942 ; -100.921,-90.176 -100.816,-90.176 ; -100.921,-90.176 -100.816,-90.176 ; -100.921,-90.176 -100.816,-90.176 ; -100.921,-90.176 -100.816,-90.176 ; -100.921,-90.176 -100.816,-90.176 ; -100.829,-94.094 -100.829,-93.942 ; -100.829,-94.094 -100.829,-93.942 ; -100.829,-94.094 -100.68,-94.243 -100.184,-94.371 ; -100.829,-94.094 -100.829,-93.942 ; -100.829,-94.094 -100.829,-93.942 ; -100.829,-94.094 -100.829,-93.942 ; -100.816,-90.176 -100.718,-90.176 ; -100.816,-90.176 -100.718,-90.176 ; -100.816,-90.176 -100.718,-90.176 ; -100.816,-90.176 -100.718,-90.176 ; -100.816,-90.176 -100.718,-90.176 ; -100.718,-90.176 cw(c-99.889,-91.017) -99.136,-91.927 ; -100.718,-90.176 cw(c-99.889,-91.017) -99.136,-91.927 ; -100.718,-90.176 cw(c-99.889,-91.017) -99.136,-91.927 ; -100.718,-90.176 cw(c-99.889,-91.017) -99.136,-91.927 ; -100.718,-90.176 cw(c-99.889,-91.017) -99.136,-91.927 ; -100.718,-90.176 cw(c-99.889,-91.017) -99.136,-91.927 ; -100.718,-90.176 cw(c-99.889,-91.017) -99.136,-91.927 ; -100.718,-90.176 cw(c-99.889,-91.017) -99.136,-91.927 ; -100.718,-90.176 cw(c-99.889,-91.017) -99.136,-91.927 ; -100.184,-94.371 ccw(c-99.889,-93.227) -99.473,-94.333 ; -100.184,-94.371 ccw(c-99.889,-93.227) -99.473,-94.333 ; -100.184,-94.371 ccw(c-99.889,-93.227) -99.473,-94.333 ; -100.184,-94.371 ccw(c-99.889,-93.227) -99.473,-94.333 ; -100.184,-94.371 ccw(c-99.889,-93.227) -99.473,-94.333 ; -100.184,-94.371 ccw(c-99.889,-93.227) -99.473,-94.333 ; -100.184,-94.371 ccw(c-99.889,-93.227) -99.473,-94.333 ; -100.184,-94.371 ccw(c-99.889,-93.227) -99.473,-94.333 ; -100.184,-94.371 ccw(c-99.889,-93.227) -99.473,-94.333 ; -99.473,-94.333 -99.235,-94.243 ; -99.473,-94.333 -99.235,-94.243 ; -99.473,-94.333 -99.235,-94.243 ; -99.473,-94.333 -99.235,-94.243 ; -99.473,-94.333 -99.235,-94.243 ; -99.235,-94.243 -99.168,-94.176 -99.063,-94.071 cw(c-98.886,-94.253) -98.709,-94.071 ccw(c-97.883,-93.227) -97.056,-94.071 cw(c-96.879,-94.253) -96.702,-94.071 ccw(c-95.876,-93.227) -95.05,-94.071 cw(c-94.873,-94.253) -94.696,-94.071 ccw(c-93.869,-93.227) -93.053,-94.081 cw(c-92.879,-94.265) -92.704,-94.081 ccw(c-91.888,-93.227) -91.062,-94.071 cw(c-90.885,-94.253) -90.708,-94.071 ; -90.708,-94.071 ccw(c-89.882,-93.227) -89.057,-94.072 ; -90.708,-94.071 ccw(c-89.882,-93.227) -89.057,-94.072 ; -90.708,-94.071 ccw(c-89.882,-93.227) -89.057,-94.072 ; -90.708,-94.071 ccw(c-89.882,-93.227) -89.057,-94.072 ; -90.708,-94.071 ccw(c-89.882,-93.227) -89.057,-94.072 ; -90.708,-94.071 ccw(c-89.882,-93.227) -89.057,-94.072 ; -90.708,-94.071 ccw(c-89.882,-93.227) -89.057,-94.072 ; -90.708,-94.071 ccw(c-89.882,-93.227) -89.057,-94.072 ; -90.708,-94.071 ccw(c-89.882,-93.227) -89.057,-94.072 ; -89.057,-94.072 -88.959,-94.072 ; -89.057,-94.072 -88.959,-94.072 ; -89.057,-94.072 -88.959,-94.072 ; -89.057,-94.072 -88.959,-94.072 ; -89.057,-94.072 -88.959,-94.072
NetJ4_23: J4.23 R48.2 U4.20 | length 35.8
  Top Layer w0.254: v1(-110.354,-81.806) R48.2@-110.354,-80.222 ; U4.20@-106.617,-70.58 -106.596,-70.559 -104.979,-70.559 -104.406,-69.986 v1(-104.131,-69.986)
  Layer 1 w0.254: J4.23@-105.884,-93.227 -107.154,-94.497 -108.322,-94.497 -109.338,-93.481 -109.338,-88.401 -110.354,-87.385 v1(-110.354,-81.806) -110.16,-81.611 -110.16,-81.222 -105.858,-76.92 -105.858,-71.728 -105.84,-71.71 -105.679,-71.548 -105.679,-70.518 -105.32,-70.159 -104.304,-70.159 v1(-104.131,-69.986)
NetJ5_1: J5.1 R49.2 U5.9 | length 50.4
  Top Layer w0.254: U5.9@-50.718,-68.107 -50.687,-68.076 -48.485,-68.076 -48.358,-67.949 -47.411,-67.949 v1(-47.342,-67.881) ; R49.2@-39.742,-83.118 -39.615,-82.991 v1(-39.615,-81.534)
  Layer 1 w0.254: v1(-47.342,-67.881) -39.615,-69.02 v1(-39.615,-81.534) -38.726,-82.178 -37.837,-82.822 -37.837,-91.14 -37.911,-91.214 -37.986,-91.288 -38.095,-91.288 ; J5.1@-42.794,-91.155 -38.095,-91.288 ; J5.1@-42.794,-91.155 -38.095,-91.288 ; J5.1@-42.794,-91.155 -38.095,-91.288
NetJ5_3: J5.3 R50.2 U5.8 | length 51.2
  Top Layer w0.254: v1(-54.855,-69.478) -54.134,-68.757 U5.8@-50.718,-68.757 -48.123,-68.757 -42.409,-74.471 -42.409,-79.587 R50.2@-42.79,-79.968
  Layer 2 w0.254: J5.3@-46.778,-91.017 -46.689,-90.928 -46.689,-88.744 v1(-46.6,-88.655)
  Bottom Layer w0.254: v1(-54.855,-69.478) -54.855,-70.574 -52.112,-73.316 -51.129,-73.316 -48.581,-75.864 -48.581,-82.837 -43.123,-88.296 -43.123,-88.506 -43.271,-88.655 v1(-46.6,-88.655)
NetJ5_5: J5.5 R51.2 U5.7 | length 30.9
  Top Layer w0.254: U5.7@-50.718,-69.407 -50.718,-69.405 U5.7@-50.664,-69.351 ; v1(-45.584,-81.543) -45.584,-80.095 R51.2@-45.711,-79.968 -45.435,-79.968 -42.917,-77.449 -42.917,-74.681 -43.672,-73.927 -43.686,-73.927 -48.206,-69.407 U5.7@-50.608,-69.407 ; U5.7@-50.664,-69.351 U5.7@-50.608,-69.407 ; U5.7@-50.664,-69.351 U5.7@-50.608,-69.407 ; U5.7@-50.664,-69.351 U5.7@-50.608,-69.407
  Layer 2 w0.254: J5.5@-50.791,-91.017 -50.791,-85.353 -46.981,-81.543 v1(-45.584,-81.543)
NetJ5_7: J5.7 R52.2 U5.6 | length 113.7
  Top Layer w0.254: v1(-53.541,-70.45) -53.347,-70.256 -52.567,-70.256 -52.398,-70.088 -50.749,-70.088 U5.6@-50.718,-70.057 -48.274,-70.057 -44.949,-73.382 -44.949,-75.341 -47.806,-78.198 -47.806,-79.417 -48.356,-79.968 R52.2@-48.632,-79.968
  Bottom Layer w0.254: v1(-53.541,-70.45) -53.347,-70.256 -53.347,-69.577 -53.331,-69.561 -53.331,-69.092 -53.961,-68.462 -56.415,-68.462 -70.095,-82.142 -70.095,-93.862 -68.698,-95.259 -67.022,-95.259 -66.171,-94.408 -47.09,-94.408 -42.301,-94.408 -41.52,-93.627 -41.52,-90.617 -42.339,-89.798 -51.242,-89.798 -51.972,-90.528 -51.972,-91.808 -52.121,-91.957 -59.469,-91.957 -59.617,-91.808 -59.617,-90.528 -60.309,-89.836 -61.288,-89.836 -61.699,-90.247 -61.816,-90.364 -62.17,-90.868 -62.319,-91.017 J5.7@-62.78,-91.017 ; J5.7@-62.78,-91.017 -62.17,-91.017 J5.7@-62.78,-91.017
NetJ5_9: J5.9 R53.2 U5.5 | length 54.9
  Top Layer w0.254: R53.2@-51.553,-79.968 -51.553,-78.978 -49.788,-77.212 -49.407,-77.212 ; U5.5@-50.718,-70.707 -48.343,-70.707 -45.457,-73.593 -45.457,-74.598 -48.071,-77.212 -49.407,-77.212 ; v1(-50.029,-75.853) -49.933,-75.95 -49.933,-76.686 -49.407,-77.212
  Layer 2 w0.254: v1(-50.029,-75.853) -50.029,-82.432 -55.236,-87.639 -63.364,-87.639 ; J5.9@-66.869,-91.144 -63.364,-87.639 ; J5.9@-66.869,-91.144 -63.364,-87.639 ; J5.9@-66.869,-91.144 -63.364,-87.639
NetJ5_11: J5.11 R54.2 U5.4 | length 34.5
  Top Layer w0.254: U5.4@-50.718,-71.357 -52.34,-71.357 -53.255,-72.272 -53.255,-79.638 -53.584,-79.968 R54.2@-54.601,-79.968 -54.601,-80.886 -54.452,-81.035 -48.276,-81.035 -47.286,-82.026 -47.286,-84.851 -41.955,-90.182 -41.609,-90.528 -41.609,-91.017 -41.609,-91.506 -41.955,-91.852 -42.015,-91.913 -42.015,-92.018 -42.015,-92.362 J5.11@-42.79,-93.227
NetJ5_13: J5.13 R55.2 U5.3 | length 57.8
  Top Layer w0.254: R55.2@-57.649,-79.968 R55.2@-57.37,-79.968 ; U5.3@-50.718,-72.007 -48.095,-72.007 -47.108,-72.994 -47.108,-73.375 -46.473,-74.01 v1(-46.473,-74.177) ; v1(-48.251,-86.369) -48.318,-86.436 -50.35,-86.436 -50.537,-86.623 -50.791,-86.623 -53.255,-84.159 -53.255,-82.2 -53.404,-82.051 -56.252,-82.051 -57.37,-80.933 ; -57.37,-80.933 R55.2@-57.37,-79.968 ; -57.37,-80.933 R55.2@-57.37,-79.968 ; -57.37,-80.933 R55.2@-57.37,-79.968
  Layer 1 w0.254: v1(-48.251,-86.369) -48.124,-86.242 -46.41,-86.242 -45.648,-87.004 -43.828,-87.004 -43.679,-86.855 -43.679,-76.971 -44.314,-76.336 v1(-46.473,-74.177)
  Layer 2 w0.254: v1(-48.251,-86.369) -48.124,-86.242 -45.895,-86.242 -41.609,-90.528 -41.609,-93.716 -42.301,-94.408 -45.597,-94.408 J5.13@-46.778,-93.227
NetJ5_15: J5.15 R56.2 U5.2 | length 61.2
  Top Layer w0.254: v1(-60.697,-81.543) R56.2@-60.697,-79.968 R56.2@-60.069,-79.968 ; v1(-51.674,-75.783) -51.674,-75.508 -52.036,-75.147 -52.036,-72.806 -51.887,-72.657 U5.2@-50.718,-72.657 ; J5.15@-50.791,-93.227 -51.049,-92.969 -51.049,-92.372 -51.222,-92.198 ; -60.069,-80.73 R56.2@-60.069,-79.968 ; -60.069,-80.73 -58.995,-81.804 -58.995,-88.661 -55.61,-92.046 -54.29,-92.046 -54.137,-92.198 ; -60.069,-80.73 R56.2@-60.069,-79.968 ; -60.069,-80.73 R56.2@-60.069,-79.968 ; -60.069,-80.73 R56.2@-60.069,-79.968 ; -60.069,-80.73 R56.2@-60.069,-79.968 ; -54.137,-92.198 -53.441,-92.198 ; -54.137,-92.198 -53.378,-92.198 ; -54.137,-92.198 -53.378,-92.198 ; -53.441,-92.198 -53.378,-92.198 ; -53.441,-92.198 -53.378,-92.198 ; -53.441,-92.198 -53.378,-92.198 ; -53.378,-92.198 cw(c-52.798,-93.227) -52.217,-92.198 ; -53.378,-92.198 cw(c-52.798,-93.227) -52.217,-92.198 ; -53.378,-92.198 cw(c-52.798,-93.227) -52.217,-92.198 ; -53.378,-92.198 cw(c-52.798,-93.227) -52.217,-92.198 ; -53.378,-92.198 cw(c-52.798,-93.227) -52.217,-92.198 ; -53.378,-92.198 cw(c-52.798,-93.227) -52.217,-92.198 ; -53.378,-92.198 cw(c-52.798,-93.227) -52.217,-92.198 ; -53.378,-92.198 cw(c-52.798,-93.227) -52.217,-92.198 ; -53.378,-92.198 cw(c-52.798,-93.227) -52.217,-92.198 ; -52.217,-92.198 -52.154,-92.198 ; -52.217,-92.198 -52.154,-92.198 ; -52.217,-92.198 -51.222,-92.198 ; -52.217,-92.198 -51.222,-92.198 ; -52.217,-92.198 -52.154,-92.198
  Layer 1 w0.254: v1(-60.697,-81.543) -60.824,-81.416 -60.824,-73.121 -60.229,-72.526 -59.387,-72.526 -56.13,-75.783 v1(-51.674,-75.783)
NetJ5_17: J5.17 R57.2 U5.23 | length 33.4
  Top Layer w0.254: R57.2@-63.745,-79.968 -63.745,-77.479 v1(-59.808,-73.542) -58.923,-72.657 U5.23@-57.468,-72.657
  Layer 1 w0.254: v1(-59.808,-73.542) -57.522,-75.828 -57.522,-91.897 -57.373,-92.046 -56.296,-92.046 -55.115,-93.227 J5.17@-54.779,-93.227
NetJ5_19: J5.19 R58.2 U5.22 | length 60.2
  Top Layer w0.254: R58.2@-66.793,-79.968 -66.589,-80.171 -66.589,-81.911 -66.738,-82.06 -67.904,-82.06 -68.127,-82.283 -68.127,-83.954 -67.904,-84.177 -66.738,-84.177 -66.589,-84.326 -66.589,-88.811 -66.44,-88.96 -63.516,-88.96 -63.134,-89.343 -63.059,-89.417 -61.186,-89.417 -61.111,-89.491 -60.834,-89.769 -60.766,-89.837 cw(c-60.799,-91.017) -59.789,-91.631 -60.024,-92.018 -60.024,-92.452 ; U5.22@-57.468,-72.007 -57.437,-72.038 -54.928,-72.038 v1(-54.785,-72.181) ; -60.024,-92.452 J5.19@-59.021,-93.456 ; -60.024,-92.452 J5.19@-59.021,-93.456 ; -60.024,-92.452 J5.19@-58.952,-93.525 ; -60.024,-92.452 J5.19@-58.952,-93.525 ; -60.024,-92.452 J5.19@-58.952,-93.525 ; J5.19@-59.021,-93.456 J5.19@-58.952,-93.525 ; J5.19@-59.021,-93.456 J5.19@-58.952,-93.525
  Layer 1 w0.254: J5.19@-58.792,-93.227 -58.792,-84.885 -61.713,-81.964 -61.713,-81.122 -61.332,-80.741 -61.332,-72.911 -60.439,-72.018 -59.177,-72.018 -59.014,-72.181 v1(-54.785,-72.181)
NetJ5_21: J5.21 R59.2 U5.21 | length 94.8
  Top Layer w0.254: R59.2@-69.841,-79.968 -70.095,-79.714 -70.095,-78.898 -69.598,-78.401 -67.588,-78.401 ; v1(-63.186,-73.796) v1@-63.085,-73.898 ; U5.21@-57.468,-71.357 -60.544,-71.357 ; -67.588,-78.401 v1@-63.085,-73.898 ; -67.588,-78.401 v1@-63.085,-73.898 ; -67.588,-78.401 v1@-63.085,-73.898 ; -67.588,-78.401 v1@-63.085,-73.898 ; -67.588,-78.401 v1@-63.085,-73.898 ; v1@-63.085,-73.898 -60.544,-71.357 ; v1@-63.085,-73.898 -60.544,-71.357 ; v1@-63.085,-73.898 -60.544,-71.357 ; v1@-63.085,-73.898 -60.544,-71.357 ; v1@-63.085,-73.898 -60.544,-71.357
  Layer 1 w0.254: J5.21@-63.237,-93.448 -63.337,-93.448 -64.297,-94.408 -66.304,-94.408 -66.939,-95.043 -69.575,-95.043 -70.565,-94.054 -70.565,-90.377 -73.905,-87.037 -73.905,-81.131 -65.173,-72.399 -64.213,-72.399 -63.646,-72.966 -63.646,-73.062 -63.186,-73.521 v1(-63.186,-73.796)
NetJ5_23: J5.23 R60.2 U5.20 | length 74.3
  Top Layer w0.254: v1(-72.889,-81.552) R60.2@-72.889,-79.968 ; v1(-64.662,-73.415) -64.634,-73.415 -61.926,-70.707 U5.20@-57.468,-70.707
  Layer 1 w0.254: -72.889,-87.334 v1(-72.889,-81.552) ; v1@-72.876,-81.657 v1@-72.876,-81.584 ; -72.871,-87.352 -70.057,-90.166 -69.918,-90.305 -69.918,-90.516 -70.057,-90.655 -70.057,-91.633 -69.441,-92.249 -70.057,-92.865 -70.057,-93.843 -69.365,-94.535 -68.387,-94.535 -67.205,-93.354 J5.23@-66.869,-93.354 ; v1(-64.662,-73.415) v1@-64.707,-73.415 ; v1@-72.876,-81.584 v1@-72.866,-81.574 ; v1@-72.876,-81.584 v1@-64.707,-73.415 ; v1@-72.876,-81.584 v1@-64.707,-73.415 ; v1@-72.876,-81.584 v1@-64.707,-73.415 ; v1@-72.876,-81.584 v1@-72.866,-81.574 ; v1@-72.866,-81.574 v1@-64.707,-73.415
NetJ6_7: J6.7 U7.7 | length 30.2
  Top Layer w0.254: U7.7@-12.788,-49.158 -10.619,-49.158 -9.115,-50.662 -9.115,-51.038 -7.611,-52.542 -7.611,-66.462 -4.623,-69.45 -3.236,-69.45 -2.661,-70.025 -2.661,-71.412 J6.7@-1.491,-72.582
NetJ6_9: J6.9 U7.6 | length 50.4
  Top Layer w0.254: U7.6@-12.788,-49.737 U7.6@-12.788,-49.764 ; v1(-11.04,-50.174) -11.315,-50.174 -11.681,-49.808 -12.365,-49.808 U7.6@-12.409,-49.764 ; U7.6@-12.788,-49.764 U7.6@-12.409,-49.764 ; U7.6@-12.788,-49.764 U7.6@-12.409,-49.764 ; U7.6@-12.788,-49.764 U7.6@-12.409,-49.764
  Layer 1 w0.254: v1(-11.04,-50.174) -11.04,-65.516 -17.136,-71.612 -17.136,-76.996 -15.612,-78.52 -8.297,-78.52 -4.724,-74.947 -4.513,-74.947 -4.048,-75.412 -3.236,-75.412 -2.661,-74.837 -2.661,-74.58 -2.512,-74.431 J6.9@-1.623,-74.431
NetJ7_1: J7.1 R61.2 U11.9 | length 36.7
  Top Layer w0.254: R61.2@-72.254,-32.437 v1(-72.254,-30.852) ; U11.9@-58.538,-43.189 -62.348,-43.189 -72.191,-33.346 ; R61.2@-72.254,-32.318 R61.2@-72.191,-32.382 ; R61.2@-72.254,-32.318 R61.2@-72.191,-32.382 ; R61.2@-72.254,-32.318 R61.2@-72.191,-32.382 ; -72.191,-33.346 R61.2@-72.191,-32.382 ; -72.191,-33.346 R61.2@-72.191,-32.382 ; -72.191,-33.346 R61.2@-72.191,-32.382
  Layer 2 w0.254: v1@-72.21,-30.778 -72.21,-19.967 cw(c-71.956,-19.967) -72.16,-19.814 cw(c-71.956,-19.967) -72.136,-19.787 -69.968,-17.619 J7.1@-69.968,-17.459
NetJ7_3: J7.3 R62.2 U11.8 | length 53
  Top Layer w0.254: R62.2@-69.333,-32.318 -69.333,-35.486 -62.28,-42.539 -57.281,-42.539 -57.132,-42.688 -57.132,-43.366 -56.374,-44.124 -55.532,-44.124 -54.479,-43.07 -54.479,-42.748 v1(-54.284,-42.554)
  Layer 2 w0.254: J7.3@-65.98,-17.459 -55.531,-27.908 -55.531,-34.47 -55.236,-34.765 -55.236,-40.863 -54.936,-41.163 -54.936,-41.769 -54.284,-42.421 v1(-54.284,-42.554)
NetJ7_5: J7.5 R63.2 U11.7 | length 52.2
  Top Layer w0.254: v1(-66.285,-30.743) -66.285,-32.241 -66.362,-32.318 R63.2@-66.412,-32.318 -66.412,-37.688 -62.211,-41.889 U11.7@-58.538,-41.889
  Bottom Layer w0.254: v1(-66.285,-30.743) -72.254,-24.774 -72.254,-19.567 -70.993,-18.306 -70.888,-18.306 -70.791,-18.306 ccw(c-69.968,-17.459) -69.505,-18.545 -68.984,-18.324 cw(c-68.885,-18.557) -68.885,-18.303 ; J7.5@-62.221,-17.916 J7.5@-62.216,-17.907 ; -68.885,-18.303 -68.787,-18.303 ; -68.885,-18.303 -68.787,-18.303 ; -68.885,-18.303 -68.787,-18.303 ; -68.787,-18.303 ccw(c-67.961,-17.459) -67.145,-18.313 ; -68.787,-18.303 ccw(c-67.961,-17.459) -67.145,-18.313 ; -68.787,-18.303 ccw(c-67.961,-17.459) -67.145,-18.313 ; -67.145,-18.313 cw(c-66.971,-18.497) -66.796,-18.313 ccw(c-65.98,-17.459) -65.154,-18.303 cw(c-64.977,-18.485) -64.8,-18.303 ; -64.8,-18.303 ccw(c-63.974,-17.459) -62.848,-17.816 ; -64.8,-18.303 ccw(c-63.974,-17.459) -62.848,-17.816 ; -64.8,-18.303 ccw(c-63.974,-17.459) -62.848,-17.816 ; -62.848,-17.816 cw(c-62.606,-17.894) J7.5@-62.434,-17.708 ; -62.848,-17.816 cw(c-62.606,-17.894) J7.5@-62.434,-17.708 ; -62.848,-17.816 cw(c-62.606,-17.894) J7.5@-62.434,-17.708 ; J7.5@-62.434,-17.708 J7.5@-62.216,-17.907 ; J7.5@-62.434,-17.708 J7.5@-62.304,-17.827 ; J7.5@-62.434,-17.708 J7.5@-62.304,-17.827 ; J7.5@-62.304,-17.827 J7.5@-62.216,-17.907
NetJ7_7: J7.7 R64.2 U11.6 | length 69.6
  Top Layer w0.254: R64.2@-63.237,-32.318 -63.237,-40.145 -62.143,-41.239 -57.281,-41.239 -57.02,-41.499 -57.02,-42.081 -55.993,-43.108 v1(-55.953,-43.108)
  Layer 2 w0.254: v1(-55.953,-43.108) -55.945,-43.108 -54.985,-44.068 -54.758,-44.068 -54.387,-43.697 -53.99,-43.697 -53.766,-43.473 -46.677,-43.473 -41.172,-37.968 -41.172,-18.224 -41.32,-18.076 -42.489,-18.076 -43.054,-18.64 -43.956,-18.64 -43.961,-18.64 ; J7.7@-49.978,-17.459 -49.721,-17.716 -49.721,-18.304 -49.384,-18.64 -47.482,-18.64 -47.145,-18.303 -47.059,-18.302 -47.046,-18.302 -46.889,-18.303 -46.526,-18.498 ; -44.515,-18.5 ccw(c-43.958,-17.459) -43.961,-18.64 ; -46.526,-18.498 ccw(c-45.965,-17.459) -45.143,-18.307 ; -46.526,-18.498 ccw(c-45.965,-17.459) -45.143,-18.307 ; -46.526,-18.498 ccw(c-45.965,-17.459) -45.143,-18.307 ; -45.143,-18.307 -45.045,-18.307 ; -45.143,-18.307 -45.045,-18.307 ; -45.143,-18.307 -45.045,-18.307 ; -45.045,-18.307 -44.877,-18.307 ; -44.877,-18.307 -44.515,-18.5 ; -44.877,-18.307 -44.515,-18.5 ; -44.877,-18.307 -44.515,-18.5 ; -44.515,-18.5 ccw(c-43.958,-17.459) -43.961,-18.64 ; -44.515,-18.5 ccw(c-43.958,-17.459) -43.961,-18.64
NetJ7_9: J7.9 R65.2 U11.5 | length 36.2
  Top Layer w0.254: v1(-60.316,-30.734) R65.2@-60.316,-32.318 -60.316,-33.156 -62.729,-35.569 -62.729,-39.934 -62.074,-40.589 U11.5@-58.538,-40.589 ; v1(-47.235,-21.599) -45.965,-20.329 J7.9@-45.965,-17.459
  Bottom Layer w0.254: v1(-60.316,-30.734) -51.181,-21.599 v1(-47.235,-21.599)
NetJ7_11: J7.11 R66.2 U11.4 | length 54.9
  Top Layer w0.254: J7.11@-69.968,-15.249 -69.205,-16.012 -69.205,-16.117 ; -69.459,-16.371 -69.508,-16.371 ; -69.205,-16.117 -69.205,-16.222 ; U11.4@-58.538,-39.939 -58.507,-39.97 -57.635,-39.97 -56.701,-40.903 -56.633,-40.903 v1(-55.952,-41.584) ; v1(-57.395,-30.743) R66.2@-57.395,-32.318 -57.67,-32.318 -58.221,-31.768 -58.221,-31.354 -58.474,-31.101 -58.474,-30.258 -58.729,-30.003 -58.729,-27.377 -67.466,-18.64 -68.451,-18.64 -68.788,-18.303 ; -69.508,-16.371 ccw(c-69.968,-17.459) -69.142,-18.303 ; -69.508,-16.371 ccw(c-69.968,-17.459) -69.142,-18.303 ; -69.508,-16.371 ccw(c-69.968,-17.459) -69.142,-18.303 ; -69.508,-16.371 -69.354,-16.371 ; -69.508,-16.371 -69.354,-16.371 ; -69.354,-16.371 -69.28,-16.297 ; -69.354,-16.371 -69.28,-16.297 ; -69.354,-16.371 -69.28,-16.297 ; -69.28,-16.297 -69.205,-16.222 ; -69.28,-16.297 -69.205,-16.222 ; -69.28,-16.297 -69.205,-16.222 ; -69.142,-18.303 cw(c-68.965,-18.485) -68.788,-18.303 ; -69.142,-18.303 cw(c-68.965,-18.485) -68.788,-18.303 ; -69.142,-18.303 cw(c-68.965,-18.485) -68.788,-18.303
  Bottom Layer w0.254: v1(-57.395,-30.743) -57.395,-37.306 -57.776,-37.687 -57.776,-39.828 -56.701,-40.903 -56.633,-40.903 v1(-55.952,-41.584)
NetJ7_13: J7.13 R67.2 U11.3 | length 46.3
  Top Layer w0.254: U11.3@-58.538,-39.289 -57.091,-39.289 -56.493,-39.887 v1(-56.252,-39.887) ; R67.2@-54.474,-32.318 v1(-54.474,-30.743)
  Layer 1 w0.254: J7.13@-65.98,-15.249 -66.291,-15.249 -67.472,-14.068 -70.457,-14.068 -71.149,-14.76 -71.149,-17.948 -71.111,-17.986 -71.111,-18.551 -70.857,-18.805 -64.888,-18.805 -54.474,-29.219 v1(-54.474,-30.743) -54.474,-37.975 -56.252,-39.753 v1(-56.252,-39.887)
NetJ7_15: J7.15 R68.2 U11.2 | length 42.8
  Top Layer w0.254: U11.2@-58.538,-38.639 -58.507,-38.608 -57.086,-38.608 -51.706,-33.228 -51.706,-32.472 R68.2@-51.553,-32.318 R68.2@-51.832,-32.318 ; v1(-51.553,-30.743) R68.2@-51.553,-32.039 ; R68.2@-51.832,-32.318 R68.2@-51.553,-32.039 ; R68.2@-51.832,-32.318 R68.2@-51.553,-32.039 ; R68.2@-51.832,-32.318 R68.2@-51.553,-32.039
  Bottom Layer w0.254: J7.15@-61.967,-15.249 -58.576,-18.64 -48.757,-18.64 -46.219,-21.178 -46.219,-25.417 -51.545,-30.743 v1(-51.553,-30.743)
NetJ7_17: J7.17 R69.2 U11.23 | length 30.3
  Top Layer w0.254: U11.23@-51.788,-38.639 -48.781,-38.639 -48.632,-38.49 R69.2@-48.632,-32.318 v1(-48.632,-30.734)
  Layer 2 w0.254: J7.17@-57.979,-15.249 -57.979,-19.237 -48.632,-28.584 v1(-48.632,-30.734)
NetJ7_19: J7.19 R70.2 U11.22 | length 42.7
  Top Layer w0.254: v1(-54.14,-40.522) -54.14,-40.471 -52.989,-39.32 -51.818,-39.32 U11.22@-51.788,-39.289 -47.232,-39.289 -45.584,-37.641 R70.2@-45.584,-32.318
  Layer 1 w0.254: v1(-54.14,-40.522) -52.696,-39.078 -52.696,-38.338 -52.845,-38.189 -53.817,-38.189 -53.966,-38.04 -53.966,-35.99 -53.151,-35.175 -53.151,-17.938 -53.966,-17.123 J7.19@-53.966,-15.249
NetJ7_21: J7.21 R71.2 U11.21 | length 40.4
  Top Layer w0.254: U11.21@-51.788,-39.939 -47.164,-39.939 -42.663,-35.438 R71.2@-42.663,-32.318 ; v1(-42.663,-30.734) R71.2@-42.663,-32.291 ; R71.2@-42.691,-32.318 R71.2@-42.663,-32.291 ; R71.2@-42.691,-32.318 R71.2@-42.663,-32.291 ; R71.2@-42.691,-32.318 R71.2@-42.663,-32.291
  Layer 1 w0.254: J7.21@-49.978,-15.249 -49.81,-15.249 -48.629,-14.068 -43.469,-14.068 -42.58,-14.957 -42.58,-16.98 -41.886,-17.674 -41.886,-23.868 -42.663,-24.646 v1(-42.663,-30.734)
NetJ7_23: J7.23 R72.2 U11.20 | length 41.3
  Top Layer w0.254: U11.20@-51.788,-40.589 -43.873,-40.589 -39.615,-36.331 v1(-39.615,-30.87)
  Layer 1 w0.254: v1(-41.139,-15.884) -41.139,-18.043 -41.315,-18.244 -41.378,-18.316 -41.378,-18.411 -41.378,-28.011 -39.615,-29.774 v1(-39.615,-30.87)
  Layer 2 w0.254: J7.23@-45.965,-15.249 -44.784,-14.068 -42.955,-14.068 v1(-41.139,-15.884)
NetJ8_1: J8.1 R73.2 U12.9 | length 35.5
  Top Layer w0.254: v1(-110.862,-30.353) R73.2@-110.862,-31.937 -110.862,-37.22 -104.411,-43.671 U12.9@-98.489,-43.671
  Layer 1 w0.254: v1(-110.862,-30.353) -110.862,-23.553 -110.506,-23.197 -110.506,-18.83 J8.1@-109.135,-17.459
NetJ8_3: J8.3 R74.2 U12.8 | length 50.9
  Top Layer w0.254: R74.2@-107.941,-31.937 -107.941,-39.415 -104.335,-43.021 U12.8@-98.489,-43.021 -98.458,-43.052 -97.425,-43.052 v1(-96.555,-43.921)
  Bottom Layer w0.254: J8.3@-105.147,-17.459 -105.147,-19.313 -98.162,-26.298 -98.162,-30.91 -97.883,-31.189 -97.883,-41.995 -97.328,-42.549 -97.149,-42.549 -96.75,-42.948 -96.75,-43.727 v1(-96.555,-43.921)
NetJ8_5: J8.5 R75.2 U12.7 | length 34
  Top Layer w0.254: v1(-105.147,-30.362) R75.2@-105.147,-31.937 -105.147,-33.156 -106.671,-34.68 -106.671,-39.967 -104.267,-42.371 U12.7@-98.489,-42.371
  Layer 1 w0.254: v1(-105.147,-30.362) -105.147,-25.962 -101.134,-21.948 J8.5@-101.134,-17.459
NetJ8_7: J8.7 R76.2 U12.6 | length 54.7
  Top Layer w0.254: R76.2@-102.099,-31.937 -102.099,-33.029 -106.163,-37.093 -106.163,-39.756 -104.931,-40.988 -103.233,-40.988 -102.5,-41.721 U12.6@-98.489,-41.721 -97.086,-41.721 -96.634,-42.173 -95.705,-42.173 -95.349,-42.529 -95.138,-42.529 -94.977,-42.367 -94.192,-42.367 v1(-94.124,-42.3)
  Layer 1 w0.254: v1(-94.124,-42.3) -89.294,-42.3 -86.478,-39.484 -86.478,-20.126 J8.7@-89.145,-17.459
NetJ8_9: J8.9 R77.2 U12.5 | length 83.1
  Top Layer w0.254: v1(-99.178,-30.353) R77.2@-99.178,-31.429 ; U12.5@-98.489,-41.071 -102.432,-41.071 -103.194,-40.308 -104.892,-40.308 -105.655,-39.546 -105.655,-37.815 -102.774,-34.934 -100.829,-34.934 -99.178,-33.283 R77.2@-99.178,-31.937 R77.2@-99.687,-31.937 ; R77.2@-99.687,-31.937 R77.2@-99.178,-31.429 ; R77.2@-99.687,-31.937 R77.2@-99.178,-31.429 ; R77.2@-99.687,-31.937 R77.2@-99.178,-31.429
  Layer 2 w0.254: v1(-99.178,-30.353) -99.111,-30.421 -99.111,-31.369 -98.187,-32.292 -85.23,-32.292 -85.081,-32.144 ; -85.081,-32.144 J8.9@-85.081,-17.262 ; -85.081,-32.144 J8.9@-85.081,-17.262 ; -85.081,-32.144 J8.9@-85.081,-17.262